# Altium PCB POWER_PCB.PcbDoc
Units mm, origin at the board's own origin, x right, y up, seen from the top; angles counter-clockwise.
Board outline 36.66 x 17.19 mm, 2 copper layers (Top Layer, Bottom Layer); 14 components, 17 nets, 67 pads, 18 vias.
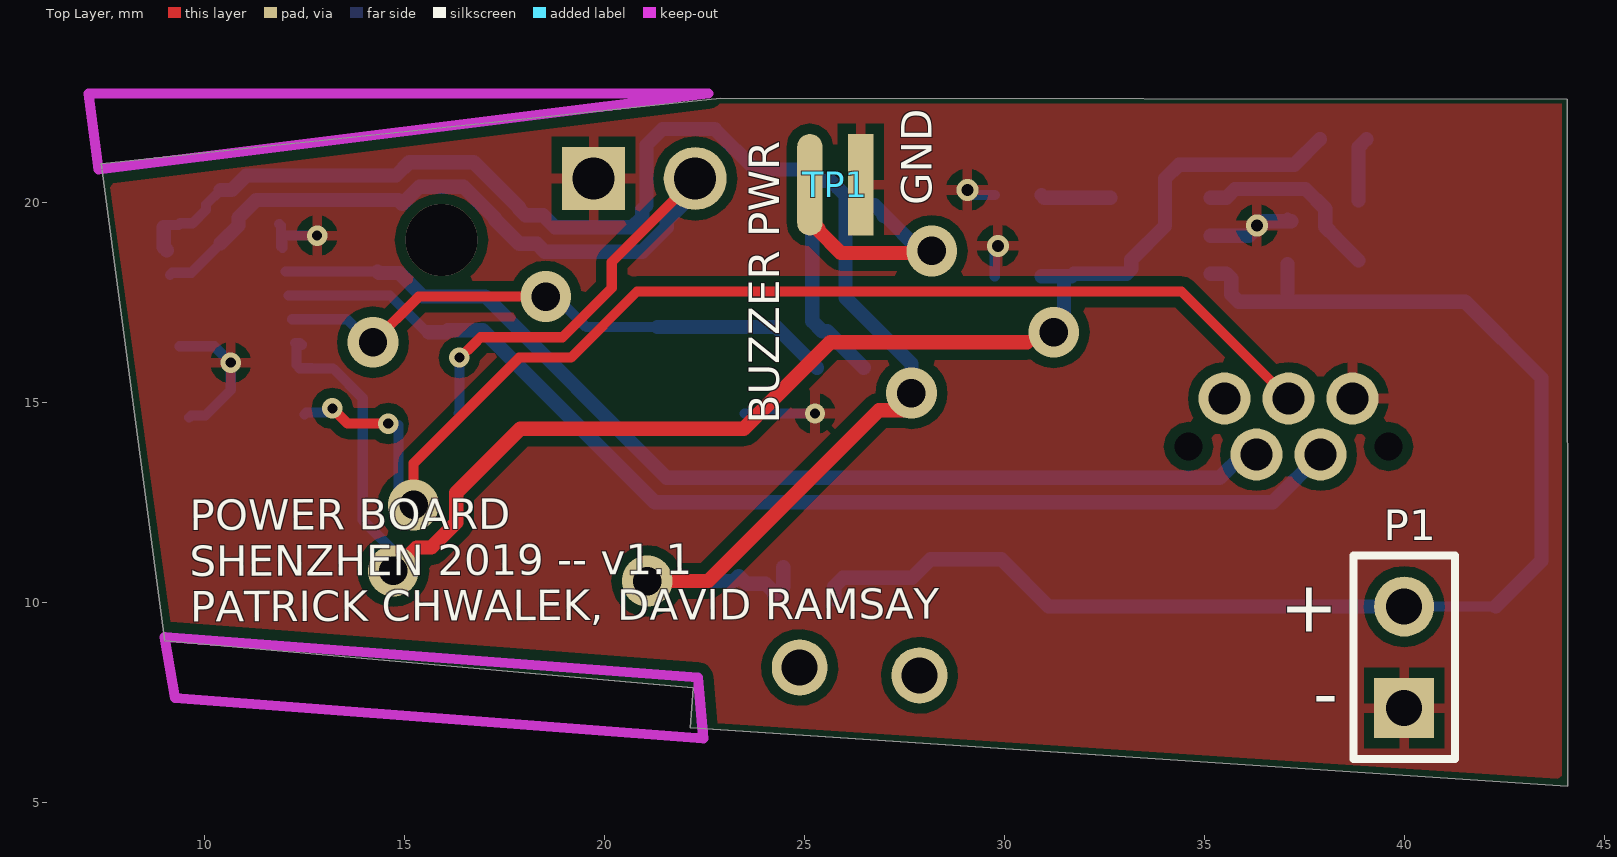
[diagram p0: Top Layer view]
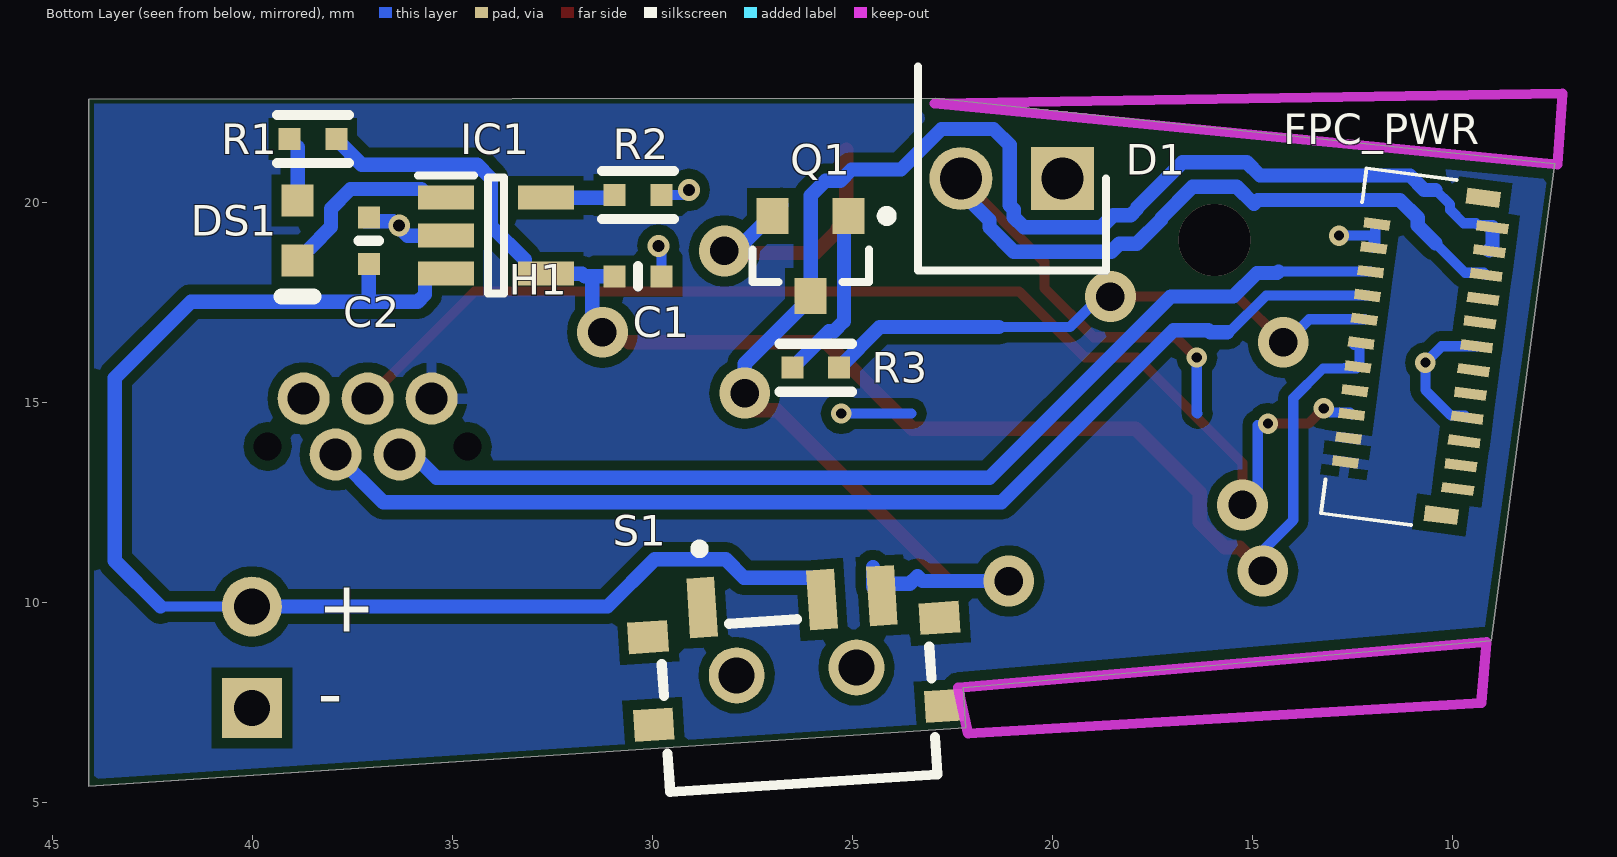
[diagram p1: Bottom Layer view, seen from below]
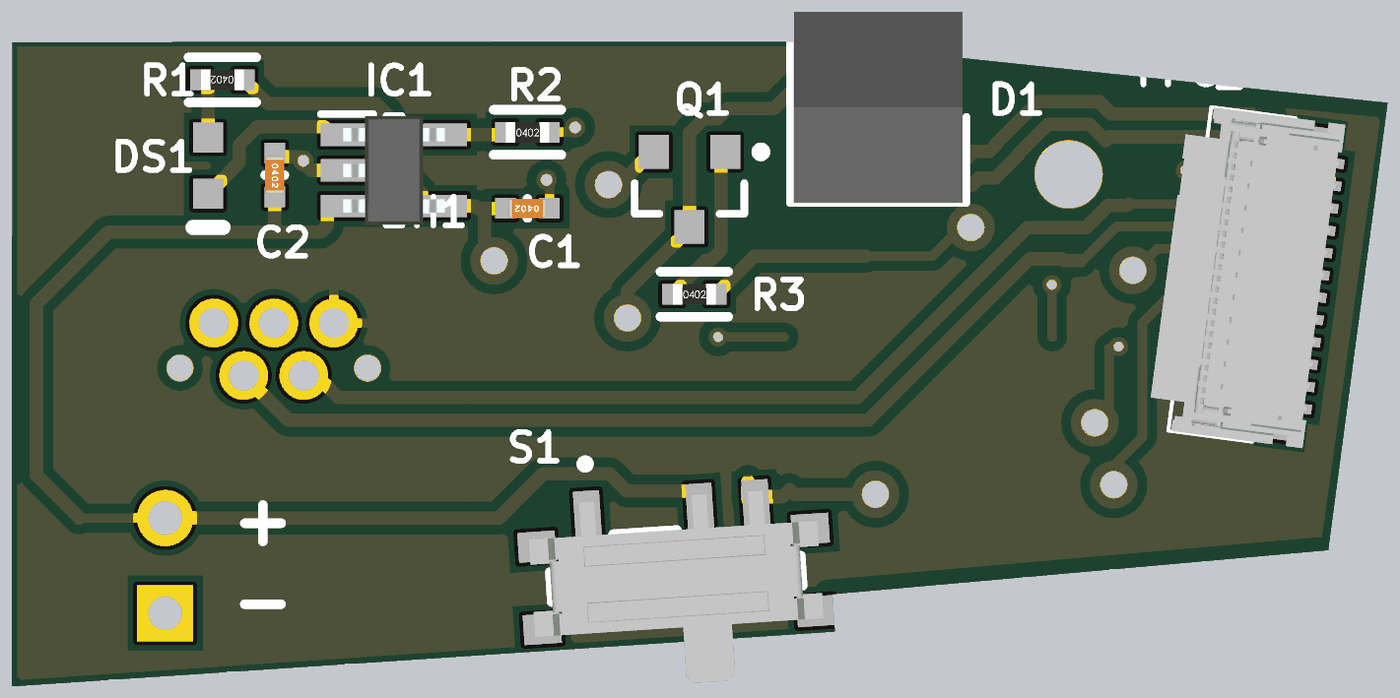
[diagram p2: 3D render of the assembled board from below, using the file's embedded part models]

## Layer stack, top to bottom
Top Solder: solder mask 0.0102, Solder Resist, Dk 3.5
Top Layer: signal copper 0.0356
Dielectric 1: dielectric 0.32, FR-4, Dk 4.8
Bottom Layer: signal copper 0.0356
Bottom Solder: solder mask 0.0102, Solder Resist, Dk 3.5

## Board outline
9.017,9.048 22.225,7.874 22.161,6.876 44.09,5.417 44.081,22.593 22.919,22.609 7.435,20.978

## Design rules (kind name [scope] priority, off if disabled: settings)
Clearance [All] p1: gap=0.254 ignorepadtopadclearanceinfootprint=FALSE except(0: Arc-Hole Track-Hole SMDPad-Hole THPad-Hole Via-Hole Fill-Hole Poly-Hole Region-Hole Text-Hole)
PolygonConnect [All] p1: connectstyle=Relief reliefconductorwidth=0.254 reliefentries=4 polygonreliefangle="90 Angle" airgapwidth=0.254
RoutingVias [All] p1: holewidth=0.254 width=0.508 viastyle="Through Hole" minholewidth=0.254 minwidth=0.508 maxholewidth=0.711 maxwidth=1.27
SolderMaskExpansion [All] p1: expansion=0.102
Width [All] p1: maxlimit=0.356 minlimit=0.254 preferedwidth=0.254 minimp=50.000000 maximp=50.000000 favimp=50.000000
30 further rules are at their usual default settings.

## Components (designator, comment, footprint, x,y, rotation, side; value= is the part's Value field where it differs from the comment)
C1 "4.7µF" SMD-0402C 30.353,18.161 r90 bottom
C2 "4.7µF" SMD-0402C 37.084,19.05 r0 bottom
D1 "BPV22NF" TO254P510X450X920-2P 19.739,20.606 r0 bottom locked
DS1 "LTST-C190KFKT" LTST-C190KFKT_V 38.862,19.304 r270 bottom
FPC_PWR "502250-2391" 5022502391 10.957,16.318 r97.55 bottom locked
H1 "HTP-CON-M413" HTP-CON-M413 37.112,14.406 r180 bottom
IC1 "MCP73831T-2DCI_OT" SOT95P270X145-5N 33.909,19.177 r180 bottom
P1 "Header 2" HDR1X2 40.005,7.366 r90 top
Q1 "MMBT3904LT1G" ONSC-SOT-23-3-318-08_V 26.035,18.669 r270 bottom
R1 "80.6k" SMD-0402-RES 38.481,21.59 r90 bottom
R2 "5.6k" SMD-0402-RES 30.353,20.193 r270 bottom
R3 "1k" SMD-0402-RES 25.908,15.875 r270 bottom
S1 "PCM12SMTR" PCM12SMTR_1 26.389,8.284 r176.25 bottom locked
TP1 "2_pin_pad" "EDGE CONNECTOR (2-MINI)" 26.416,20.447 r180 top

## Footprints (in the part's own frame and the unit in brackets; to place one, negate y for a bottom-side part, rotate by r counter-clockwise, add the part's x,y. Pads: shape width x height; smd on the part's side, far side on the other; paste and mask are expansions set on the pad)
5022502391 [mm]
  rect 0.26x0.8 smd: 1(-3.3,-1.545) 3(-2.7,-1.545) 5(-2.1,-1.545) 7(-1.5,-1.545) 9(-0.9,-1.545) 11(-0.3,-1.545) 13(0.3,-1.545) 15(0.9,-1.545) 17(1.5,-1.545) 19(2.1,-1.545) 21(2.7,-1.545) 23(3.3,-1.545)
  rect 0.26x0.65 smd: 2(-3,1.33) 4(-2.4,1.33) 6(-1.8,1.33) 8(-1.2,1.33) 10(-0.6,1.33) 12(0,1.33) 14(0.6,1.33) 16(1.2,1.33) 18(1.8,1.33) 20(2.4,1.33) 22(3,1.33)
  rect 0.4x0.85 smd: MP1(-4,-1.22) MP2(4,-1.22)
  silkscreen extent -4.35,-0.5 4.35,1.77, body extent -4.35,-1.84 4.35,2.35, height 0.9
"EDGE CONNECTOR (2-MINI)" [mm]
  rect 0.635x2.54 smd paste+0.2: 1(0,0)
  oval 0.635x2.54 smd paste+0.2: 2(1.27,0)
HDR1X2 [mm] "Connector; Header; 2 Position"
  rect 1.5x1.5 hole 0.9: 1(0,0)
  round 1.5 hole 0.9: 2(2.54,0)
  silkscreen extent -1.27,-1.27 3.81,1.27
HTP-CON-M413 [mm]
  round 1.3 hole 0.8: 1(1.6,0.7) 2(0.8,-0.7) 3(0,0.7) 4(-0.8,-0.7) 5(-1.6,0.7)
  round 0 hole 0.7: ""(-2.5,-0.5) ""(2.5,-0.5)
LTST-C190KFKT_V [mm] "SMD, 2-Leads, Body 1.6x0.8mm"
  rect 0.8x0.8 smd: 1(-0.75,0) 2(0.75,0)
  silkscreen extent 1.65,-0.4 1.65,0.4, body extent -0.8,-0.4 0.8,0.4, height 0.9
ONSC-SOT-23-3-318-08_V [mm] "SOT23, 3-Leads, Body 2.92x1.3mm, Pitch 0.95mm"
  rect 0.9x0.8 smd: 1(-1,0.95) 2(-1,-0.95) 3(1,0)
  silkscreen extent -1.12,-1.46 0.65,2.02, body extent -0.65,-1.46 0.65,1.46, height 1.11
PCM12SMTR_1 [mm]
  rect 0.7x1.5 smd: 1(-2.25,1.75) 2(0.75,1.75) 3(2.25,1.75)
  rect 1x0.8 smd: 4(-3.65,1.1) 5(-3.65,-1.1) 6(3.65,1.1) 7(3.65,-1.1)
  round 1.4 hole 0.9: 8(-1.5,0) 9(1.5,0)
  silkscreen extent -3.35,-2.8 3.35,3.32, body extent -3.85,-2.8 3.85,2.2, height 1.4
SMD-0402-RES [mm]
  rect 0.55x0.55 smd: 1(0,0.584) 2(0,-0.584)
  silkscreen extent -0.6,-0.9 0.6,0.9, body extent -0.27,-0.57 0.28,0.58, height 0.41
SMD-0402C [mm]
  rect 0.55x0.55 smd: 1(0,0.584) 2(0,-0.584)
  silkscreen extent -0.25,0 0.25,0, body extent -0.25,-0.51 0.25,0.51, height 0.51
SOT95P270X145-5N [mm]
  rect 1.4x0.6 smd: 1(-1.25,0.95) 2(-1.25,0) 3(-1.25,-0.95) 4(1.25,-0.95) 5(1.25,0.95)
  silkscreen extent -1.95,-1.45 0.2,1.5, body extent -1.35,-1.45 1.35,1.45, height 1.45
TO254P510X450X920-2P [mm]
  rect 1.575x1.575 hole 1.05: 1(0,0)
  round 1.575 hole 1.05: 2(2.54,0)
  silkscreen extent -1.08,-2.8 3.62,2.3, body extent -0.98,-2.8 3.52,2.3, height 8.6

## Part data
C1 C2: library part GRM153R60G475ME15D, "CAP CER 4.7UF 4V X5R 0402", Digi-Key Part Number=490-13231-1-ND, Manufacturer="Murata Electronics North America", Operating Temperature="-55°C ~ 85°C", Package / Case="0402 (1005 Metric)", Ratings=-, Temperature Coefficient=X5R, Tolerance=±20%, Voltage=4V, @ qty=0, Applications="General Purpose", Datasheets=http://psearch.en.murata.com/capacitor/product/GRM153R60G475ME15%23.pdf, Factory Stock=0, Features=-, Height - Seated (Max)=-, Image=//media.digikey.com/Renders/Murata%20Renders/ZRB-SERIES-0402.jpg, Lead Spacing=-, Lead Style=-, Minimum Quantity=1, Mounting Type="Surface Mount, MLCC", Packaging="Cut Tape (CT)", Part Number=GRM153R60G475ME15D, Part Status=Active, Quantity Available=9100, Series=GRM, Size / Dimension="0.039\" L x 0.020\" W (1.00mm x 0.50mm)", Thickness (Max)="0.013\" (0.33mm)", Unit Price (USD)=0.27
D1: "Diode", Manufacturer_Name=Vishay, Mouser Part Number=782-BPV22NF, RS Part Number=6997604P, Allied_Number=R1086877, Allied Price/Stock=https://www.alliedelec.com/vishay-dale-bpv22nf/R1086877/, Datasheet Link=http://www.vishay.com/docs/81509/bpv22nf.pdf, Height=5.1mm, Manufacturer_Part_Number=BPV22NF, Mouser Price/Stock=https://www.mouser.com/Search/Refine.aspx?Keyword=782-BPV22NF, RS Price/Stock=http://uk.rs-online.com/web/p/products/6997604P
DS1: library part CMP-1674-00008-1, "LED Uni-Color Orange, 75 mW, 30 mA, -35 to 85 degC, 2-Pin SMD, RoHS, Tape and Reel", Case\Package=0603, Case Code (Metric)=1608, Max Operating Temperature="155 degC", Min Operating Temperature="-55 degC", Package Quantity=5000, Power Rating="100 mW", Resistance="47 kohm", Tolerance=1%, Voltage Rating="50 V", Case Code (Imperial)=0603, ComponentLink1Description="Manufacturer URL", ComponentLink1URL=http://www.us.liteon.com/, ComponentLink2Description=Datasheet, ComponentLink2URL=http://optoelectronics.liteon.com/upload/download/DS-22-99-0186/S_110_LTST-C190KFKT.pdf, DatasheetVersion="Rev. I, 09/2011", Height="0.45 mm", Length="1.6 mm", Mount="Surface Mount", PackageDescription="2-Pin Surface Mount Device, Body 1.6 x 0.8 mm", PackageReference=C190KFKT, Packaging="Tape and Reel", Pins=2, REACH SVHC="No SVHC", RoHSCompliant=true, Voltage Rating (DC)="50 V", Width="0.8 mm"
FPC_PWR: "Connector", Manufacturer_Name=Molex, Mouser Part Number=538-502250-2391, Datasheet Link=https://www.molex.com/pdm_docs/sd/5022501791_sd.pdf, Height=1.85mm, Manufacturer_Part_Number=502250-2391, Mouser Price/Stock=https://www.mouser.com/Search/Refine.aspx?Keyword=538-502250-2391, System=Connector
IC1: "Integrated Circuit", Manufacturer_Name=Microchip, Manufacturer_Part_Number=MCP73831T-2DCI/OT, Mouser Part Number=579-MCP73831T-2DCIOT, RS Part Number=7240599P, Allied_Number=70414854, Allied Price/Stock=http://www.alliedelec.com/microchip-technology-inc-mcp73831t-2dci-ot/70414854/, Datasheet Link=http://ww1.microchip.com/downloads/en/DeviceDoc/20001984g.pdf, Height=1.45mm, Mouser Price/Stock=https://www.mouser.com/Search/Refine.aspx?Keyword=579-MCP73831T-2DCIOT, RS Price/Stock=http://uk.rs-online.com/web/p/products/7240599P
P1: "Header, 2-Pin", LatestRevisionDate=17-Jul-2002, LatestRevisionNote="Re-released for DXP Platform.", Publisher="Altium Limited"
Q1: library part CMP-1048-00631-1, "General Purpose Transistor, NPN Silicon, 3-Pin SOT-23, Pb-Free, Tape and Reel", Manufacturer="On Semiconductor", ComponentLink1Description="Manufacturer URL", ComponentLink1URL=http://www.onsemi.com/, ComponentLink2Description=Datasheet, ComponentLink2URL=http://www.onsemi.cn/pub_link/Collateral/MMBT3904LT1-D.PDF, ComponentLink3Description="Package Specification", ComponentLink3URL=http://www.onsemi.cn/pub_link/Collateral/318-08.PDF, DatasheetVersion="Rev. 12", fT Min (MHz)=300, IC Continuous (A)=0.2, Mounting Technology="Surface Mount", PackageDescription="3-Pin Small Outline Transistor, Body 2.92 x 1.3 mm, Pitch 0.95 mm", PackageReference=SOT-23-3-318-08, PackageVersion="Rev. AP, 11/2009", Packing="Tape and Reel", PartNumber=MMBT3904LT1G, Polarity=NPN, RoHS=TRUE
R1: library part ERJ-2RKF8062X, "RES SMD 80.6K OHM 1% 1/10W 0402", Digi-Key Part Number=P80.6KLCT-ND, Manufacturer="Panasonic Electronic Components", Operating Temperature="-55°C ~ 155°C", Package / Case="0402 (1005 Metric)", Power (Watts)="0.1W, 1/10W", Supplier Device Package=0402, Temperature Coefficient=±100ppm/°C, Tolerance=±1%, @ qty=1500, Composition="Thick Film", Datasheets=http://industrial.panasonic.com/www-cgi/jvcr13pz.cgi?E+PZ+3+AOA0002+ERJ2RKF8062X+7+WW, Factory Stock=0, Failure Rate=-, Features="Automotive AEC-Q200", Height - Seated (Max)="0.016\" (0.40mm)", Image=//media.digikey.com/Photos/Panasonic%20Photos/ERJ-PA2-Series.jpg, Minimum Quantity=1, Number of Terminations=2, Packaging="Cut Tape (CT)", Part Number=ERJ-2RKF8062X, Part Status=Active, Quantity Available=91747, Series=ERJ, Size / Dimension="0.039\" L x 0.020\" W (1.00mm x 0.50mm)", Unit Price (USD)=0.00496
R2: library part ERJ-2GEJ562X, "RES SMD 5.6K OHM 5% 1/10W 0402", Digi-Key Part Number=P5.6KJCT-ND, Manufacturer="Panasonic Electronic Components", Operating Temperature="-55°C ~ 155°C", Package / Case="0402 (1005 Metric)", Power (Watts)="0.1W, 1/10W", Supplier Device Package=0402, Temperature Coefficient=±200ppm/°C, Tolerance=±5%, @ qty=1500, Composition="Thick Film", Datasheets=http://industrial.panasonic.com/www-cgi/jvcr13pz.cgi?E+PZ+3+AOA0001+ERJ2GEJ562X+7+WW, Factory Stock=0, Failure Rate=-, Features="Automotive AEC-Q200", Height - Seated (Max)="0.016\" (0.40mm)", Image=//media.digikey.com/Photos/Panasonic%20Photos/ERJ-PA2-Series.jpg, Minimum Quantity=1, Number of Terminations=2, Packaging="Cut Tape (CT)", Part Number=ERJ-2GEJ562X, Part Status=Active, Quantity Available=212112, Series=ERJ, Size / Dimension="0.039\" L x 0.020\" W (1.00mm x 0.50mm)", Unit Price (USD)=0.00350
R3: library part ERJ-2GEJ102X, "RES SMD 1K OHM 5% 1/10W 0402", Digi-Key Part Number=P1.0KJCT-ND, Manufacturer="Panasonic Electronic Components", Operating Temperature="-55°C ~ 155°C", Package / Case="0402 (1005 Metric)", Power (Watts)="0.1W, 1/10W", Supplier Device Package=0402, Temperature Coefficient=±200ppm/°C, Tolerance=±5%, @ qty=1500, Composition="Thick Film", Datasheets=http://industrial.panasonic.com/www-cgi/jvcr13pz.cgi?E+PZ+3+AOA0001+ERJ2GEJ102X+7+WW, Factory Stock=0, Failure Rate=-, Features="Automotive AEC-Q200", Height - Seated (Max)="0.016\" (0.40mm)", Image=//media.digikey.com/Photos/Panasonic%20Photos/ERJ-PA2-Series.jpg, Minimum Quantity=1, Number of Terminations=2, Packaging="Cut Tape (CT)", Part Number=ERJ-2GEJ102X, Part Status=Active, Quantity Available=1939857, Series=ERJ, Size / Dimension="0.039\" L x 0.020\" W (1.00mm x 0.50mm)", Unit Price (USD)=0.00350
S1: "Switch", Manufacturer_Name="C & K COMPONENTS", Mouser Part Number=611-PCM12SMTR, RS Part Number=7931721P, Allied_Number=70417448, Allied Price/Stock=https://www.alliedelec.com/c-k-pcm12smtr/70417448/, Datasheet Link=http://www.farnell.com/datasheets/1789487.pdf, Manufacturer_Part_Number=PCM12SMTR, Mouser Price/Stock=https://www.mouser.com/Search/Refine.aspx?Keyword=611-PCM12SMTR, RS Price/Stock=http://uk.rs-online.com/web/p/products/7931721P

## Via types
v1: diameter 1.27, hole 0.711, Top Layer to Bottom Layer, tented both sides, 8 vias
v2: diameter 0.508, hole 0.254, Top Layer to Bottom Layer, tented both sides, 6 vias
v3: diameter 0.548, hole 0.3, Top Layer to Bottom Layer, tented both sides, 3 vias
v4: diameter 1.8, hole 1.8, Top Layer to Bottom Layer, 1 vias

## Nets (pads, with @x,y where several pads share a name; then routed paths per layer and width w, separated by ;. In a path a pad name is that pad's centre, name@x,y a point inside that pad or via, vN(x,y) a via of type N, cw(c..) or ccw(c..) an arc to the next point about the centre after c; other vN are vias at no path point)
3.3V: FPC_PWR.2 FPC_PWR.4 H1.1 | length 0
5V: C1.1 FPC_PWR.10 FPC_PWR.12 IC1.4 R1.2 | length 36.8
  Top Layer w0.356: v1(14.732,10.795) 15.316,11.379 15.682,11.379 16.307,12.004 16.307,12.751 17.907,14.351 23.495,14.351 25.654,16.51 30.576,16.51
  Bottom Layer w0.254: FPC_PWR.12 12.401,16.493 12.446,16.448 12.315,16.448 12.315,15.943 12.393,15.864 12.685,15.864 12.694,15.856 13.227,15.856 13.97,15.113 13.97,12.065 14.732,11.303 v1(14.732,10.795)
  Bottom Layer w0.356: C1.1 31.496,18.161 ; v1(31.242,16.764) 31.496,17.018 31.496,18.161 ; R1.2 37.257,20.951 34.372,20.951 34.027,20.606 34.027,19.422 33.181,18.576 33.181,18.349 33.059,18.227 IC1.4 31.75,18.227 31.684,18.161 31.496,18.161
ANALOG_EXP_CONN: FPC_PWR.6 H1.3 | length 30.5
  Top Layer w0.254: v2(13.208,14.859) 13.589,14.478 v2(14.605,14.478) ; v1(15.24,12.446) 15.24,13.49 17.879,16.129 19.173,16.129 20.824,17.78 34.438,17.78 H1.3
  Bottom Layer w0.254: FPC_PWR.6 12.557,14.753 13.033,14.753 13.139,14.859 v2(13.208,14.859) ; v2(14.605,14.478) 14.645,14.438 14.859,14.438 14.859,12.827 v1(15.24,12.446)
GND: C1.2 C2.2 D1.1 FPC_PWR.7 FPC_PWR.13 FPC_PWR.20 FPC_PWR.22 H1.5 IC1.2 P1.1 R2.1 TP1.1 | length 11
  Bottom Layer w0.254: FPC_PWR.13 10.258,16.412 v2(10.668,16.002) 10.668,15.318 10.032,14.682 9.677,14.682 FPC_PWR.7 ; FPC_PWR.22 11.921,19.427 11.921,18.911 FPC_PWR.20 11.96,19.177 v2(12.827,19.177) ; 23.514,14.732 v2(25.273,14.732) v2@25.4,14.732 ; v3(29.083,20.32) 29.21,20.193 R2.1 ; C1.2 29.769,18.847 v3(29.845,18.923) ; C2.2 C2.2@37.181,19.537
  Bottom Layer w0.356: IC1.2 36.119,19.177 v3@36.373,19.431 ; v3(36.322,19.431) v3@36.373,19.431 ; C2.2@37.181,19.537 36.479,19.537 v3@36.373,19.431
I2C1_SCL: FPC_PWR.18 H1.2 | length 26.8
  Bottom Layer w0.254: FPC_PWR.18 14.34,18.277
  Bottom Layer w0.356: 14.34,18.277 14.376,18.241 14.881,18.241 15.47,17.653 17.033,17.653 21.562,13.124 35.394,13.124 35.96,13.69 35.96,13.802 36.056,13.706 H1.2
I2C1_SDA: FPC_PWR.16 H1.4 | length 28.5
  Bottom Layer w0.254: FPC_PWR.16 14.65,17.682 15.568,16.764 15.621,16.764
  Bottom Layer w0.356: 15.621,16.764 16.048,16.764 16.099,16.815 16.967,16.815 21.267,12.515 36.721,12.515 H1.4
LH_DIODE_ARRAY: D1.2 FPC_PWR.19 | length 25.5
  Top Layer w0.254: v2(16.383,16.129) 16.394,16.118 16.764,16.488 16.913,16.637 18.963,16.637 20.193,17.867 20.193,18.52 D1.2
  Bottom Layer w0.254: FPC_PWR.19 9.204,18.251 9.679,18.251 10.414,18.986 ; 16.364,14.732 16.383,14.751 v2(16.383,16.129)
  Bottom Layer w0.356: 10.414,18.986 10.861,19.433 10.861,19.624 11.307,20.07 14.855,20.07 14.955,19.97 15.385,20.401 16.489,20.401 17.269,19.621 17.269,19.588 17.883,18.974 18.323,18.974 18.52,18.777 20.958,18.777 21.568,19.387 21.568,19.565 22.279,20.276 D1.2
NetDS1_1: DS1.1 R1.1 | length 1.6
  Bottom Layer w0.356: DS1.1 38.862,21.387 R1.1
NetDS1_2: DS1.2 IC1.1 | length 4.8
  Bottom Layer w0.356: IC1.1 35.559,20.127 35.773,20.341 37.538,20.341 38.03,19.849 38.03,19.399 38.299,19.13 38.299,19.117 DS1.2
NetIC1_5: IC1.5 R2.2 | length 1.7
  Bottom Layer w0.356: R2.2 31.003,20.127 IC1.5
NetQ1_1: Q1.1 R3.2 | length 4.4
  Bottom Layer w0.356: Q1.1 25.203,19.551 25.203,17.04 25.456,16.787 25.58,16.787 R3.2
NetQ1_2: Q1.2 TP1.2 | length 7.2
  Top Layer w0.356: TP1.2@25.146,21.324 TP1.2 25.146,19.57 25.361,19.355 25.361,19.304 25.92,18.745 28.143,18.745 v1(28.194,18.796)
  Bottom Layer w0.356: Q1.2@26.763,19.941 Q1.2@26.985,19.719 ; Q1.2 Q1.2@26.985,19.719 ; v1(28.194,18.796) 27.908,18.796 Q1.2@26.985,19.719
PA0: FPC_PWR.14 R3.1 | length 14.6
  Top Layer w0.254: v1(14.224,16.51) 15.367,17.653 v1(18.542,17.653)
  Bottom Layer w0.254: FPC_PWR.14 13.575,17.088 14.153,16.51 v1(14.224,16.51) v1@14.207,16.493 ; v1(18.542,17.653) 18.796,17.653 19.558,16.891 21.336,16.891
  Bottom Layer w0.356: 21.336,16.891 24.308,16.891 R3.1
SPI_SCK: FPC_PWR.9
SPI_SDIO: FPC_PWR.11
VBAT: FPC_PWR.21 FPC_PWR.23 Q1.3 S1.3 | length 40.4
  Top Layer w0.356: v1(21.082,10.541) 22.606,10.541 26.876,14.811 27.511,14.811 27.686,14.986 v1(27.686,15.24)
  Bottom Layer w0.254: FPC_PWR.23 9.046,19.441 9.357,19.441 9.404,19.488 9.716,19.488 10.051,19.823 10.051,19.957 10.414,20.32
  Bottom Layer w0.356: FPC_PWR.23 8.992,18.889 FPC_PWR.21@9.071,18.81 ; 10.414,20.32 10.695,20.32 11.055,20.68 14.802,20.68 15.133,21.01 16.741,21.01 17.878,19.873 17.878,19.841 18.034,19.685 18.474,19.685 18.773,19.387 20.705,19.387 20.958,19.64 20.958,19.834 21.06,19.935 21.06,21.441 21.463,21.844 22.765,21.844 23.781,20.828 25.019,20.828 25.296,20.551 25.664,20.551 26.035,20.18 Q1.3 26.035,17.627 27.686,15.976 v1(27.686,15.24) ; v1(21.082,10.541) 23.241,10.541 23.368,10.668 23.559,10.477 24.038,10.477 24.258,10.256 S1.3 24.479,10.398 S1.3@24.479,10.89
VBAT_RAW: C2.1 IC1.3 P1.2 S1.2 | length 34.6
  Bottom Layer w0.254: P1.2 40.005,9.779 40.132,9.652 40.386,9.906 42.291,9.906
  Bottom Layer w0.356: S1.2 25.755,10.406 25.975,10.627 27.703,10.627 28.162,11.086 29.935,11.086 31.115,9.906 P1.2 ; IC1.3 35.558,18.227 35.681,18.105 35.681,17.705 35.86,17.526 37.084,17.526 ; C2.1 37.084,17.526 ; 42.291,9.906 43.434,11.049 43.434,15.621 41.529,17.526 37.084,17.526
pads on no net: FPC_PWR.1 FPC_PWR.3 FPC_PWR.5 FPC_PWR.8 FPC_PWR.15 FPC_PWR.17 FPC_PWR.MP1 FPC_PWR.MP2 H1. S1.1 S1.4 S1.5 S1.6 S1.7 S1.8 S1.9
copper on no net:
  other v4: 15.937,19.069

## Polygon pours and split planes (outlines as drawn)
GND on Top Layer "Top Layer-GND" (solid, remove dead copper, pour order 6): 43.942,22.479 43.942,5.588 9.398,7.874 7.366,22.479
3.3V on Bottom Layer "Bottom Layer-3.3V" (solid, remove dead copper, pour order 10): 43.942,22.479 43.942,5.588 9.398,7.874 7.366,22.479

## Keep-outs
Top Layer:
  lines w0.254: 7.112,22.733 22.606,22.733 7.366,20.828 7.112,22.733 ; 9.017,9.144 22.352,8.128 22.479,6.604 9.271,7.62 9.017,9.144
Bottom Layer:
  lines w0.254: 7.239,22.733 22.933,22.479 7.366,20.955 7.239,22.733 ; 9.144,9.017 9.271,7.493 22.098,6.731 22.352,7.874 9.144,9.017

## Silkscreen, mask and mechanical layers (free items; w line width, h text height)
Top Overlay:
  text "GND" at 28.194,19.939 h0.76 r90
  text "BUZZER PWR" at 24.384,14.478 h0.76 r90
  text "POWER BOARD / SHENZHEN 2019 -- v1.1 / PATRICK CHWALEK, DAVID RAMSAY" at 9.652,9.525 h0.76 r0.23
  text "+" at 38.354,9.271 h1.27
  text "-" at 38.354,7.112 h1.27
Bottom Overlay:
  text "+" at 38.354,9.271 h1.27
  text "-" at 38.354,7.112 h1.27
Mechanical 1:
  the board outline again, w0.051
Mechanical BS:
  lines w0.05: 7.435,20.978 9.017,9.048 22.225,7.874 22.161,6.876 44.09,5.417 44.09,5.417 44.081,22.593 22.919,22.609 22.919,22.609 7.435,20.978